# EAGLE board FIPI_shematics (EAGLE 8.2.1)
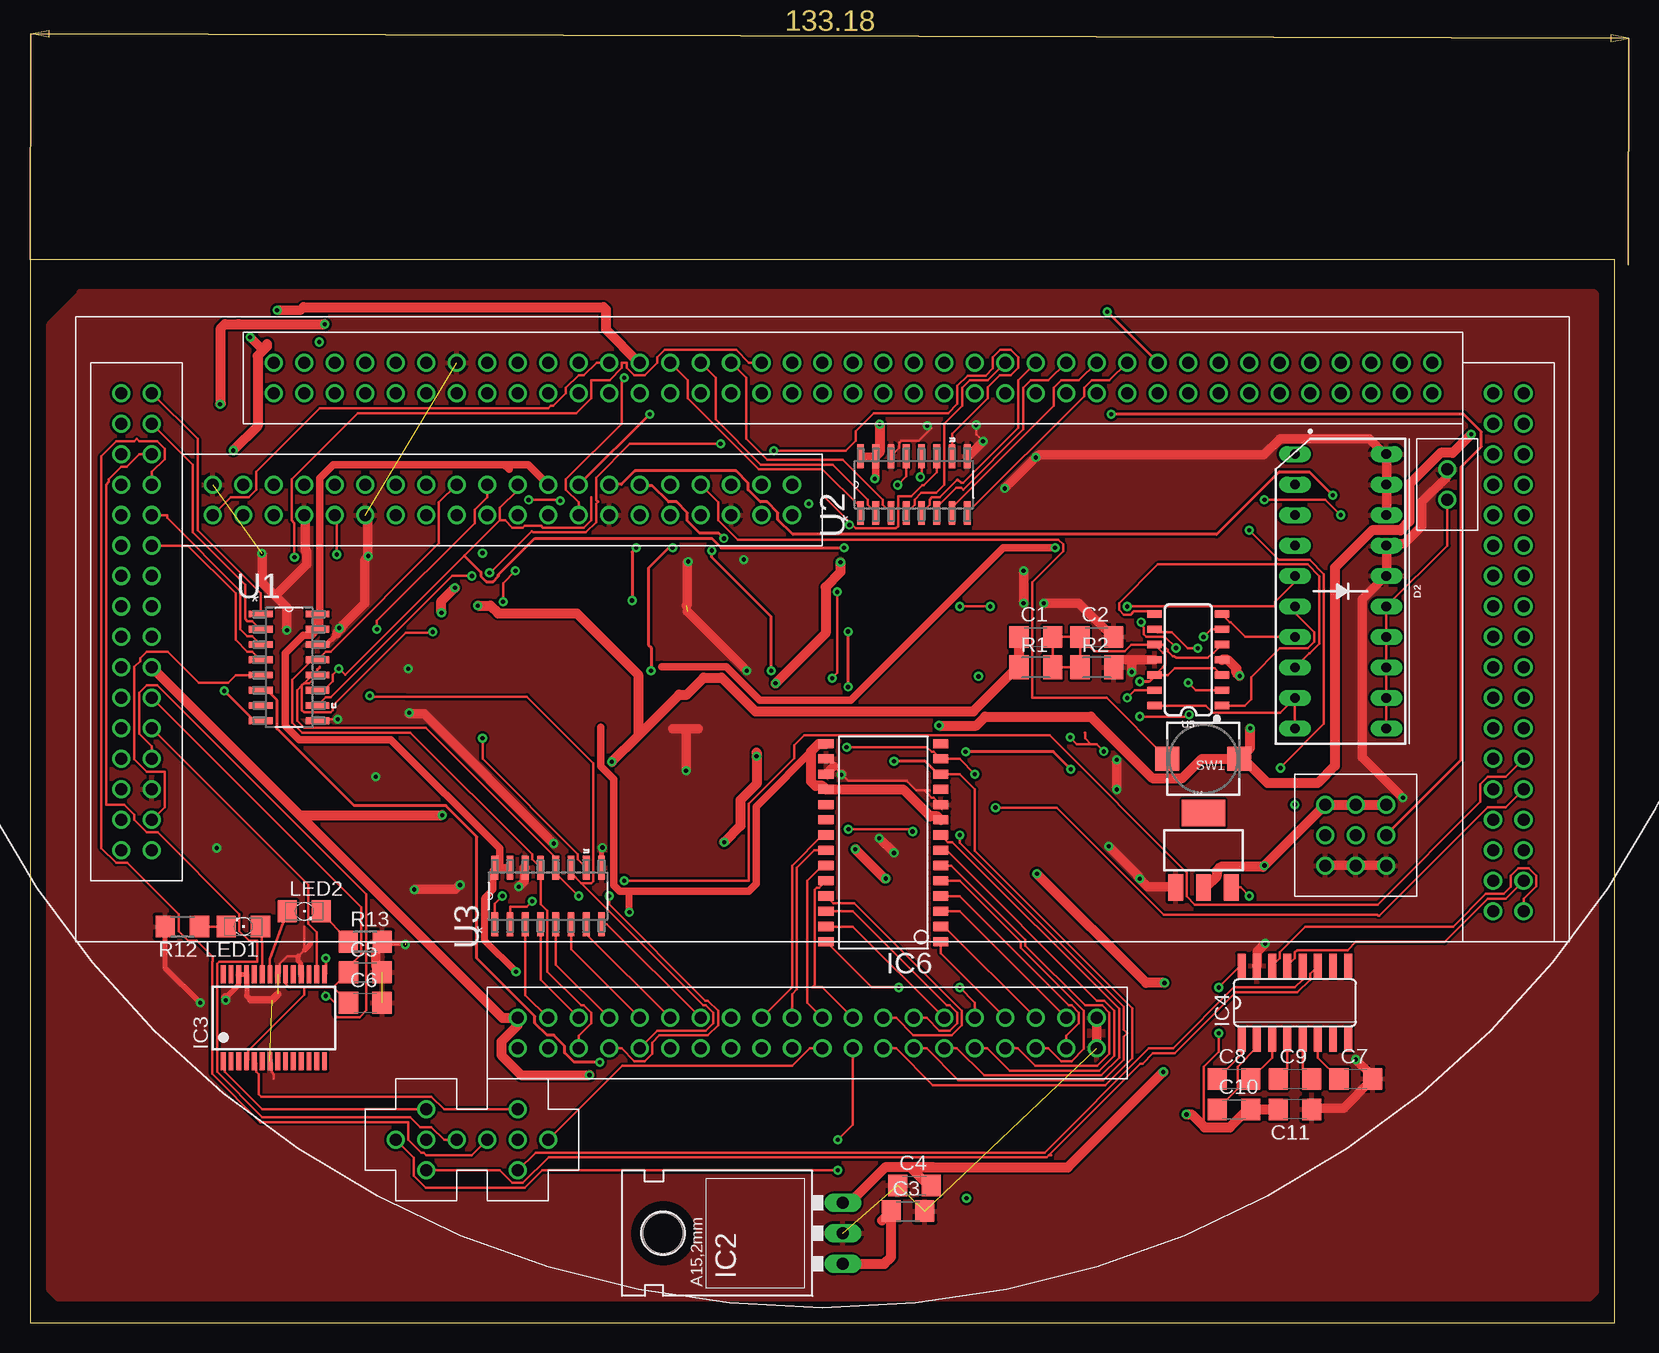
[diagram p0: board, top side]
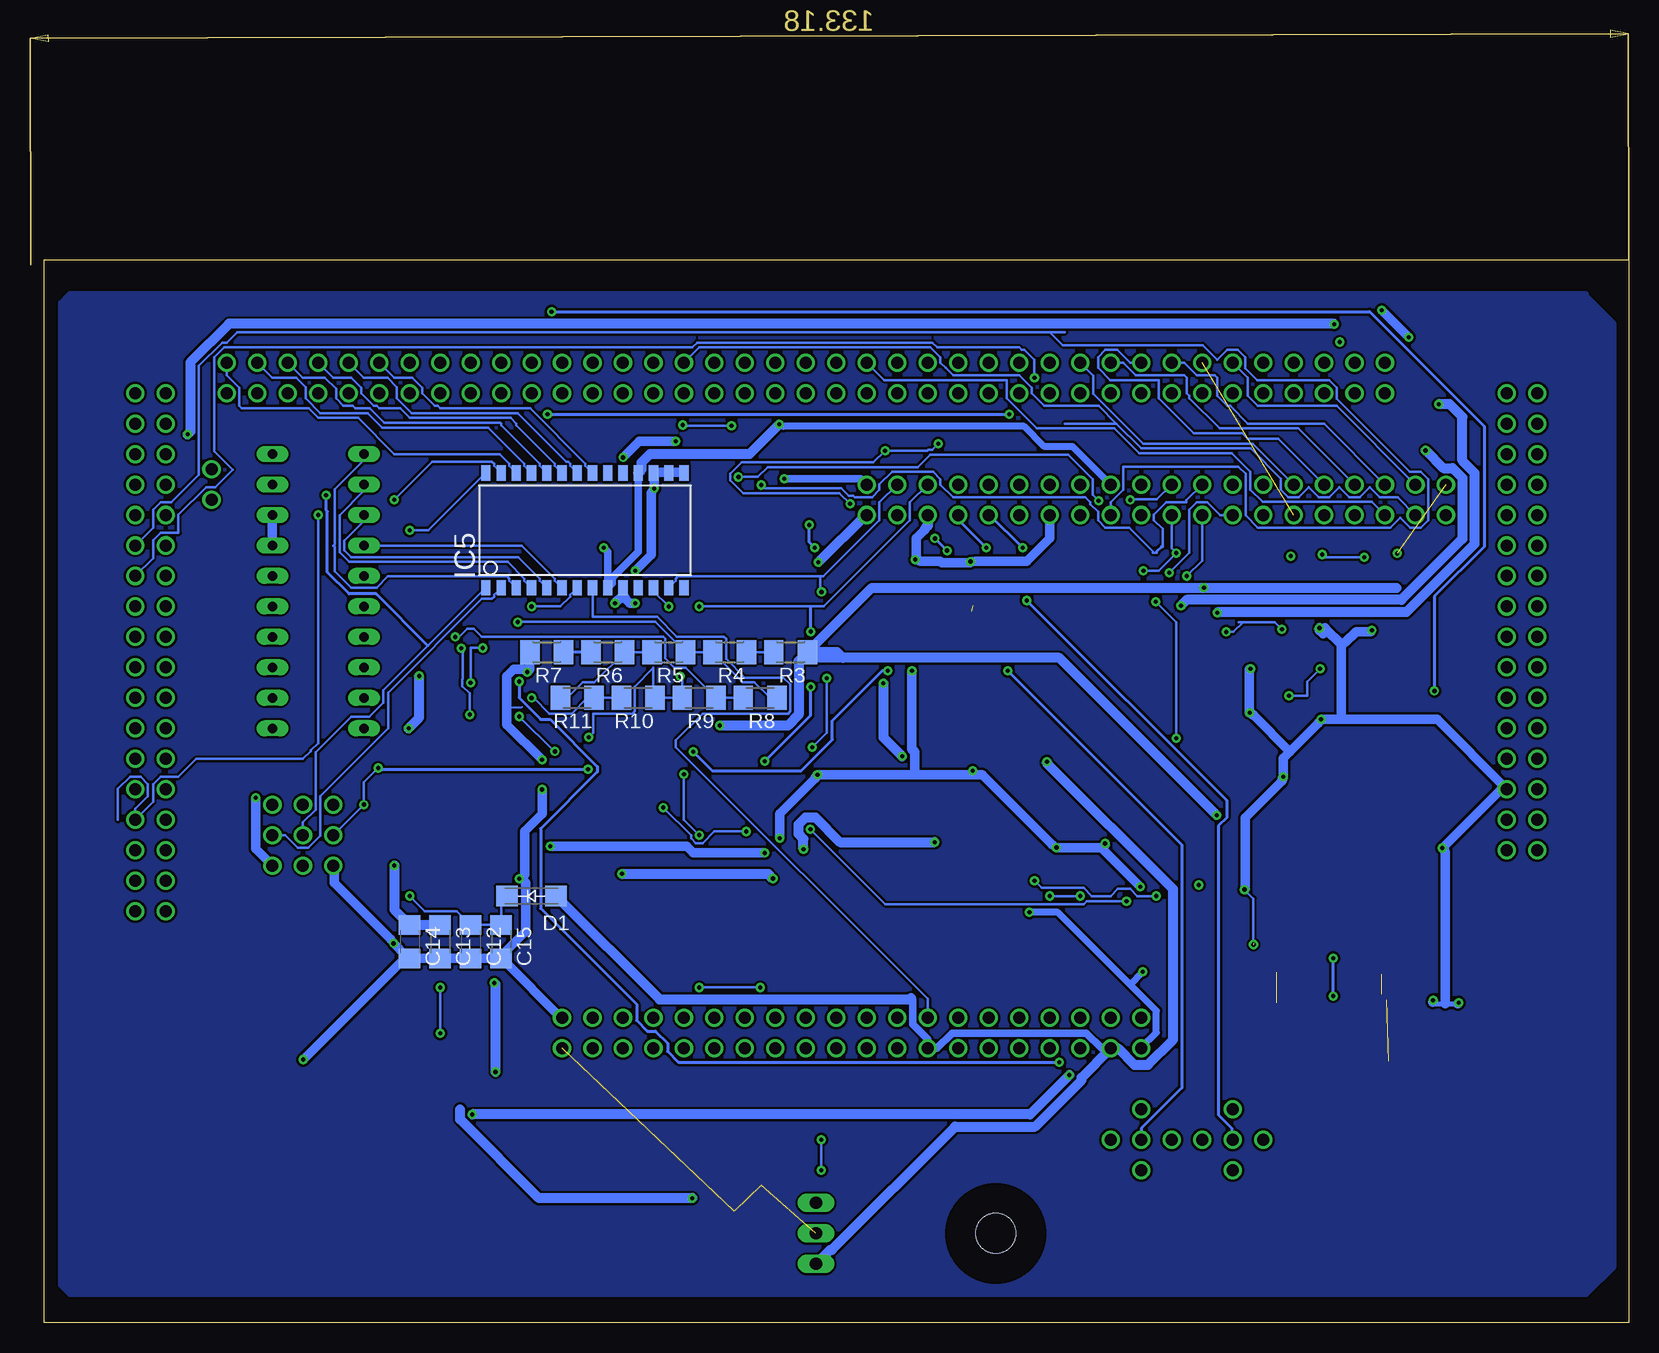
[diagram p1: board, bottom side, seen from below]

Size 132.06 x 88.57 mm. Coordinates in mm from the lower left corner, seen from the top.
Outline: 0,0 132.06,0 132.06,88.57 0,88.57 0,0
Copper layers (1*16): Top 0.035mm / dielectric 1.5mm / Bottom 0.035mm
Design rules "default": minimum track width 6mil, minimum drill 0.35mm, track to track 6mil, track to pad 6mil, pad to pad 6mil, via to via 6mil, smd to smd 6mil, copper to edge 40mil, drill to drill 6mil, minimum pad ring 10mil, minimum via ring 8mil, stop-mask expansion 4mil, vias tented up to drill 0mil, thermal gap 10mil
Net classes: 0 default: width 0.25 mm, clearance 0.2 mm; 1 power: width 0.8 mm, clearance 0.2 mm; 2 3.3v: width 0.6 mm, clearance 0.2 mm

## Footprints (pad centres in the part's own frame; a part is rotated, then mirrored left to right if it is on the bottom)
C1206 = smd 1.6 x 1.8: 1 -1.4,0; 2 1.4,0
SMA = smd 1.8 x 1.7: A -2.05,0; K 2.05,0
LED_BARGRAPH_10 = drill 0.813 long: 1 -11.43,-3.81; 2 -8.89,-3.81; 3 -6.35,-3.81; 4 -3.81,-3.81; 5 -1.27,-3.81; 6 1.27,-3.81; 7 3.81,-3.81; 8 6.35,-3.81; 9 8.89,-3.81; 10 11.43,-3.81; 11 11.43,3.81; 12 8.89,3.81; 13 6.35,3.81; 14 3.81,3.81; 15 1.27,3.81; 16 -1.27,3.81; 17 -3.81,3.81; 18 -6.35,3.81; 19 -8.89,3.81; 20 -11.43,3.81
78XXL = drill 1.016 long: GND 0,-3.81; IN -2.54,-3.81; OUT 2.54,-3.81 | hole 3.302: 0,11.176
SSOP28 = smd 0.4 x 1.5: 1 -4.225,-3.625; 2 -3.575,-3.625; 3 -2.925,-3.625; 4 -2.275,-3.625; 5 -1.625,-3.625; 6 -0.975,-3.625; 7 -0.325,-3.625; 8 0.325,-3.625; 9 0.975,-3.625; 10 1.625,-3.625; 11 2.275,-3.625; 12 2.925,-3.625; 13 3.575,-3.625; 14 4.225,-3.625; 15 4.225,3.625; 16 3.575,3.625; 17 2.925,3.625; 18 2.275,3.625; 19 1.625,3.625; 20 0.975,3.625; 21 0.325,3.625; 22 -0.325,3.625; 23 -0.975,3.625; 24 -1.625,3.625; 25 -2.275,3.625; 26 -2.925,3.625; 27 -3.575,3.625; 28 -4.225,3.625
SO16 = smd 0.66 x 2.032: 1 -4.445,-3.073; 2 -3.175,-3.073; 3 -1.905,-3.073; 4 -0.635,-3.073; 5 0.635,-3.073; 6 1.905,-3.073; 7 3.175,-3.073; 8 4.445,-3.073; 9 4.445,3.073; 10 3.175,3.073; 11 1.905,3.073; 12 0.635,3.073; 13 -0.635,3.073; 14 -1.905,3.073; 15 -3.175,3.073; 16 -4.445,3.073
SO28W = smd 0.762 x 1.27: 1 -7.62,-4.78; 2 -6.35,-4.78; 3 -5.08,-4.78; 4 -3.81,-4.78; 5 -2.54,-4.78; 6 -1.27,-4.78; 7 0,-4.78; 8 1.27,-4.78; 9 2.54,-4.78; 10 3.81,-4.78; 11 5.08,-4.78; 12 6.35,-4.78; 13 7.62,-4.78; 14 8.89,-4.78; 15 8.89,4.78; 16 7.62,4.78; 17 6.35,4.78; 18 5.08,4.78; 19 3.81,4.78; 20 2.54,4.78; 21 1.27,4.78; 22 0,4.78; 23 -1.27,4.78; 24 -2.54,4.78; 25 -3.81,4.78; 26 -5.08,4.78; 27 -6.35,4.78; 28 -7.62,4.78
LED_1206 = smd 1.6 x 1.803: A -1.422,0; C 1.422,0
M1206 = smd 1.6 x 2: 1 -1.4,0; 2 1.4,0
R1206 = smd 1.6 x 1.803: 1 -1.422,0; 2 1.422,0
MALE_HEADER_PACKAGE = drill 1: 1 -35.56,12.7; 2 -35.56,15.24; 3 -33.02,12.7; 4 -33.02,15.24; 5 -30.48,12.7; 6 -30.48,15.24; 7 -27.94,12.7; 8 -27.94,15.24; 9 -25.4,12.7; 10 -25.4,15.24; 11 -22.86,12.7; 12 -22.86,15.24; 13 -20.32,12.7; 14 -20.32,15.24; 15 -17.78,12.7; 16 -17.78,15.24; 17 -15.24,12.7; 18 -15.24,15.24; 19 -12.7,12.7; 20 -12.7,15.24; 21 -10.16,12.7; 22 -10.16,15.24; 23 -7.62,12.7; 24 -7.62,15.24; 25 -5.08,12.7; 26 -5.08,15.24; 27 -2.54,12.7; 28 -2.54,15.24; 29 0,12.7; 30 0,15.24; 31 2.54,12.7; 32 2.54,15.24; 33 5.08,12.7; 34 5.08,15.24; 35 7.62,12.7; 36 7.62,15.24; 37 10.16,12.7; 38 10.16,15.24; 39 12.7,12.7; 40 12.7,15.24
PUSHBUTTON_SMD_SJ = smd 2 x 2: P$1 3,0; P$2 -3,0
SOIC127P600X175-16N = smd 1.981 x 0.559: 1 -2.362,4.445; 2 -2.362,3.175; 3 -2.362,1.905; 4 -2.362,0.635; 5 -2.362,-0.635; 6 -2.362,-1.905; 7 -2.362,-3.175; 8 -2.362,-4.445; 9 2.362,-4.445; 10 2.362,-3.175; 11 2.362,-1.905; 12 2.362,-0.635; 13 2.362,0.635; 14 2.362,1.905; 15 2.362,3.175; 16 2.362,4.445
SOT223 = smd 1.219 x 2.235: 1 -2.311,-3.099; 2 0,-3.099; 3 2.311,-3.099 | smd 3.6 x 2.2: 4 0,3.099
SO14 = smd 0.6 x 1.2: 1 -3.175,-2.8; 2 -1.905,-2.8; 3 -0.635,-2.8; 4 0.635,-2.8; 5 1.905,-2.8; 6 3.175,-2.8; 7 4.445,-2.8; 8 4.445,2.8; 9 3.175,2.8; 10 1.905,2.8; 11 0.635,2.8; 12 -0.635,2.8; 13 -1.905,2.8; 14 -3.175,2.8
FEMHEADER = drill 1: 1 -83.82,-7.62; 2 -83.82,-5.08; 3 -83.82,-2.54; 4 -83.82,0; 5 -83.82,2.54; 6 -83.82,5.08; 7 -83.82,7.62; 8 -83.82,10.16; 9 -83.82,12.7; 10 -83.82,15.24; 11 -83.82,17.78; 12 -83.82,20.32; 13 -83.82,22.86; 14 -83.82,25.4; 15 -83.82,27.94; 16 -83.82,30.48; 17 -71.12,33.02; 18 -68.58,33.02; 19 -66.04,33.02; 20 -63.5,33.02; 21 -60.96,33.02; 22 -58.42,33.02; 23 -55.88,33.02; 24 -53.34,33.02; 25 -50.8,33.02; 26 -48.26,33.02; 27 -45.72,33.02; 28 -43.18,33.02; 29 -40.64,33.02; 30 -38.1,33.02; 31 -35.56,33.02; 32 -33.02,33.02; 33 -30.48,33.02; 34 -27.94,33.02; 35 -25.4,33.02; 36 -22.86,33.02; 37 -20.32,33.02; 38 -17.78,33.02; 39 -15.24,33.02; 40 -12.7,33.02; 41 -10.16,33.02; 42 -7.62,33.02; 43 -5.08,33.02; 44 -2.54,33.02; 45 0,33.02; 46 2.54,33.02; 47 5.08,33.02; 48 7.62,33.02; 49 10.16,33.02; 50 12.7,33.02; 51 15.24,33.02; 52 17.78,33.02; 53 20.32,33.02; 54 22.86,33.02; 55 25.4,33.02; 57 33.02,30.48; 58 33.02,27.94; 59 33.02,25.4; 60 33.02,22.86; 61 33.02,20.32; 62 33.02,17.78; 63 33.02,15.24; 64 33.02,12.7; 65 33.02,10.16; 66 33.02,7.62; 67 33.02,5.08; 68 33.02,2.54; 69 33.02,0; 70 33.02,-2.54; 71 33.02,-5.08; 72 33.02,-7.62; 73 33.02,-10.16; 74 33.02,-12.7; P1 -81.28,-7.62; P2 -81.28,-5.08; P3 -81.28,-2.54; P4 -81.28,0; P5 -81.28,2.54; P6 -81.28,5.08; P7 -81.28,7.62; P8 -81.28,10.16; P9 -81.28,12.7; P10 -81.28,15.24; P11 -81.28,17.78; P12 -81.28,20.32; P13 -81.28,22.86; P14 -81.28,25.4; P15 -81.28,27.94; P16 -81.28,30.48; P17 -71.12,30.48; P18 -68.58,30.48; P19 -66.04,30.48; P20 -63.5,30.48; P21 -60.96,30.48; P22 -58.42,30.48; P23 -55.88,30.48; P24 -53.34,30.48; P25 -50.8,30.48; P26 -48.26,30.48; P27 -45.72,30.48; P28 -43.18,30.48; P29 -40.64,30.48; P30 -38.1,30.48; P31 -35.56,30.48; P32 -33.02,30.48; P33 -30.48,30.48; P34 -27.94,30.48; P35 -25.4,30.48; P36 -22.86,30.48; P37 -20.32,30.48; P38 -17.78,30.48; P39 -15.24,30.48; P40 -12.7,30.48; P41 -10.16,30.48; P42 -7.62,30.48; P43 -5.08,30.48; P44 -2.54,30.48; P45 0,30.48; P46 2.54,30.48; P47 5.08,30.48; P48 7.62,30.48; P49 10.16,30.48; P50 12.7,30.48; P51 15.24,30.48; P52 17.78,30.48; P53 20.32,30.48; P54 22.86,30.48; P55 25.4,30.48; P57 30.48,30.48; P58 30.48,27.94; P59 30.48,25.4; P60 30.48,22.86; P61 30.48,20.32; P62 30.48,17.78; P63 30.48,15.24; P64 30.48,12.7; P65 30.48,10.16; P66 30.48,7.62; P67 30.48,5.08; P68 30.48,2.54; P69 30.48,0; P70 30.48,-2.54; P71 30.48,-5.08; P72 30.48,-7.62; P73 30.48,-10.16; P74 30.48,-12.7
SWITCH_RXTX = drill 1: RX -12.7,7.62; RXFT -12.7,10.16; RXP -10.16,7.62; RXRS -12.7,5.08; RXXB -15.24,7.62; TX -20.32,7.62; TXFT -20.32,10.16; TXP -22.86,7.62; TXRS -20.32,5.08; TXXB -17.78,7.62
SWITCH1 = drill 1: 1 -12.7,5.08; 2 -10.16,5.08
PORT_EXP = drill 1: 1 -25.4,5.08; 2 -22.86,5.08; 3 -20.32,5.08; 4 -17.78,5.08; 5 -15.24,5.08; 6 -12.7,5.08; 7 -10.16,5.08; 8 -7.62,5.08; 9 -5.08,5.08; 10 -2.54,5.08; 11 0,5.08; 12 2.54,5.08; 13 5.08,5.08; 14 7.62,5.08; 15 10.16,5.08; 16 12.7,5.08; 17 15.24,5.08; 18 17.78,5.08; 19 20.32,5.08; 20 22.86,5.08; 21 22.86,2.54; 22 20.32,2.54; 23 17.78,2.54; 24 15.24,2.54; 25 12.7,2.54; 26 10.16,2.54; 27 7.62,2.54; 28 5.08,2.54; 29 2.54,2.54; 30 0,2.54; 31 -2.54,2.54; 32 -5.08,2.54; 33 -7.62,2.54; 34 -10.16,2.54; 35 -12.7,2.54; 36 -15.24,2.54; 37 -17.78,2.54; 38 -20.32,2.54; 39 -22.86,2.54; 40 -25.4,2.54
SERVO = drill 1: 1 -20.32,5.08; 1" -15.24,5.08; 1' -17.78,5.08; 2 -20.32,2.54; 2" -15.24,2.54; 2' -17.78,2.54; 3 -20.32,0; 3" -15.24,0; 3' -17.78,0

## Placement (x,y rotation side)
C1  0.1u  [C1206]  83.82,57.15 0 top
C2  0.1u  [C1206]  88.9,57.15 0 top
C3  10u  [C1206]  73.16,9.3 0 top
C4  1u  [C1206]  73.71,11.44 0 top
C5  100u  [C1206]  27.94,29.21 0 top
C6  0.1u  [C1206]  27.94,26.67 0 top
C7  0.1u  [C1206]  110.49,20.32 0 top
C8  0.1u  [C1206]  100.33,20.32 0 top
C9  0.1u  [C1206]  105.41,20.32 0 top
C10  0.1u  [C1206]  100.33,17.78 0 top
C11  0.1u  [C1206]  105.41,17.78 180 top
C12  10u  [C1206]  96.52,31.75 270 bottom
C13  10u  [C1206]  99.06,31.75 270 bottom
C14  10u  [C1206]  101.6,31.75 270 bottom
C15  10u  [C1206]  93.98,31.75 270 bottom
D1  1N4007  [SMA]  91.44,35.56 180 bottom
D2  RED  [LED_BARGRAPH_10]  109.22,60.96 270 top
IC2  [78XXL]  63.93,7.45 90 top
IC3  FT232RL  [SSOP28]  20.32,25.4 0 top
IC4  MAX202CSE  [SO16]  105.41,26.67 0 top
IC5  MCP23017SO  [SO28W]  87.63,66.04 0 bottom
IC6  MCP23017SO  [SO28W]  71.12,39.37 90 top
LED1  [LED_1206]  17.78,33.02 180 top
LED2  [LED_1206]  22.86,34.29 0 top
R1  10k  [M1206]  83.82,54.61 0 top
R2  3.3k  [M1206]  88.9,54.61 0 top
R3  10k  [M1206]  69.85,55.88 180 bottom
R4  10k  [M1206]  74.93,55.88 180 bottom
R5  10k  [M1206]  80.01,55.88 180 bottom
R6  10k  [M1206]  85.09,55.88 180 bottom
R7  10k  [M1206]  90.17,55.88 180 bottom
R8  10k  [M1206]  72.39,52.07 180 bottom
R9  10k  [M1206]  77.47,52.07 180 bottom
R10  10k  [M1206]  82.55,52.07 180 bottom
R11  10k  [M1206]  87.63,52.07 180 bottom
R12  270E  [R1206]  12.7,33.02 180 top
R13  270E  [R1206]  27.94,31.75 0 top
RASPPI  MALE_HEADER  [MALE_HEADER_PACKAGE]  27.94,82.55 180 top
SW1  [PUSHBUTTON_SMD_SJ]  97.79,46.99 180 top
U1  MCP3008-I/SL  [SOIC127P600X175-16N]  21.59,54.61 0 top
U2  MCP3008-I/SL  [SOIC127P600X175-16N]  73.66,69.85 90 top
U3  MCP3008-I/SL  [SOIC127P600X175-16N]  43.18,35.56 90 top
U4  [SOT223]  97.79,39.37 0 top
U5  LMV324  [SO14]  96.52,54.61 90 top
U$1  BOARD  [FEMHEADER]  91.44,46.99 0 top
U$3  SWITCH_RXTX  [SWITCH_RXTX]  53.34,7.62 0 top
U$4  SWITCH1  [SWITCH1]  113.03,58.42 270 top
U$5  PORT_EXP  [PORT_EXP]  66.04,20.32 0 top
U$7  SERVO  [SERVO]  128.27,38.1 0 top

## Library data of the parts
C1-C15 = rcl
D1 = casovac
D2 = SparkFun-LED; PROD_ID: DIO-10615
IC2 = tango
IC3 = ftdichip; MPN: FT232RL; OC_FARNELL: 1146032; OC_NEWARK: 91K9918
IC4 = maxim-8
IC5 IC6 SW1 = adafruit
LED1 LED2 = eagle-ltspice; SPICEMODEL: NONE; SPICEPREFIX: D; SPICETYPE: diode
R1-R13 = resistor
RASPPI = male_header_device
U1-U3 = MCP3008-I_SL; AVAILABILITY: Good; DESCRIPTION: Eight Channel SPI Serial Interface 2.7 V 10-Bit A/D Converter SMT - SOIC-16; MF: Microchip; MP: MCP3008-I/SL; PACKAGE: SOIC-16 Microchip; PRICE: 2.02 USD
U4 = SparkFun-IC-Power; PROD_ID: VREG-08170
U5 = SparkFun-IC-Amplifiers; PROD_ID: IC-08227
U$1 U$5 = fem_header
U$3 U$4 U$7 = switch

## Nets
3.3V [3.3v]: IC5.9 IC5.18 IC6.9 IC6.15 IC6.18 RASPPI.1 RASPPI.17 U1.15 U1.16 U2.15 U2.16 U3.15 U3.16 U$5.40
5V [power]: C10.2 C11.2 IC4.16 R3.1 SW1.P$2 U5.4 U$1.P7 U$5.1
5V_SERVO: C13.1 C14.1 U4.2 U$7.1 U$7.1" U$7.1'
9-12V [power]: C1.1 C3.1 D1.A IC2.IN R1.1 U$1.29 U$5.33 U$5.39
BARGRAPH1: D2.1 IC5.3
BARGRAPH2: D2.2 IC5.4
BARGRAPH3: D2.3 IC5.5
BARGRAPH4: D2.4 IC5.6
BARGRAPH5: D2.5 IC5.7
BUZZER: IC5.27 U$1.71
CE0: RASPPI.24 U1.10
CE1: RASPPI.26 U2.10
CE2: RASPPI.22 U3.10
DB4: RASPPI.33 U$1.26
DB5: RASPPI.31 U$1.25
DB6: RASPPI.29 U$1.27
DB7: RASPPI.40 U$1.28
EN: RASPPI.35 U$1.24
GND [power]: C2.2 C3.2 C4.1 C5.2 C6.2 C7.2 C11.1 C12.2 C13.2 C14.2 C15.2 D2.16 D2.17 D2.18 D2.19 D2.20 IC2.GND IC3.7 IC3.18 IC3.21 IC3.25 IC3.26 IC4.15 IC5.10 IC5.15 IC5.16 IC5.17 IC6.10 IC6.16 IC6.17 R2.2 R7.2 R12.2 R13.2 RASPPI.6 RASPPI.14 RASPPI.30 RASPPI.34 RASPPI.39 U1.9 U1.14 U2.9 U2.14 U3.9 U3.14 U4.1 U5.11 U$1.23 U$1.P3 U$4.1 U$5.20 U$5.21 U$7.3 U$7.3" U$7.3'
INTERRUPT: RASPPI.7 SW1.P$1
IRP1: U1.3 U$1.P12
IRP2: U1.1 U$1.P16
IRP3: U2.5 U$1.42
IRP4: U2.6 U$1.43
IRP5: U1.8 U$1.46
IRP6: U3.1 U$1.69
IRP7: U3.2 U$1.70
IRP8: U1.5 U$1.P2
IRPD: RASPPI.36 U$1.34
L1: IC5.22 U$1.51
L2: IC5.23 U$1.52
MB73: IC4.13 U$1.73
MB74: IC4.14 U$1.74
MISO: RASPPI.21 U1.12 U2.12 U3.12 U$5.37
MOSI: RASPPI.19 U1.11 U2.11 U3.11 U$5.36
N$1: R3.2 R4.1
N$2: C12.1 C15.1 D1.K U4.3
N$3: R4.2 R5.1 R8.1 U5.2
N$4: R5.2 R6.1 R11.2
N$5: R6.2 R7.1
N$6: R8.2 R9.1 U5.6
N$7: R9.2 R10.1 U5.9
N$8: R10.2 R11.1 U5.13
N$9: D2.11 D2.12 D2.13 D2.14 D2.15 U$4.2
N$14: D2.9 D2.10 U5.14
N$15: D2.8 U5.8
N$16: D2.7 U5.7
N$17: D2.6 U5.1
N$19: C8.1 IC4.1
N$20: C8.2 IC4.3
N$21: C9.1 IC4.4
N$22: C9.2 IC4.5
N$23: IC3.23 LED1.A
N$24: IC3.22 LED2.A
N$25: LED1.C R12.1
N$26: LED2.C R13.1
PEL: RASPPI.18 U$1.62
PER: RASPPI.16 U$1.63
PWML: IC5.21 U$1.50
PWMR: IC5.25 U$1.54
R1: IC5.24 U$1.53
R2: IC5.26 U$1.55
RASP_5V [power]: C4.2 IC2.OUT RASPPI.2
RS: RASPPI.37 U$1.22
RX: RASPPI.8 U$3.RX
RXFT: IC3.5 U$3.RXFT
RXP: U$3.RXP U$5.30
RXRS: IC4.12 U$3.RXRS
RXXB: U$1.P13 U$3.RXXB
SCL: IC5.12 IC6.12 RASPPI.5 U$5.28
SCLK: RASPPI.23 U1.13 U2.13 U3.13 U$5.38
SDA: IC5.13 IC6.13 RASPPI.3 U$5.27
SERVO1: IC5.28 RASPPI.11 U$7.2
SERVO2: IC5.1 RASPPI.13 U$7.2'
SERVO3: IC5.2 RASPPI.15 U$7.2"
SIR1: U1.4 U$1.P11
SIR2: U1.2 U$1.P15
SIR3: U2.4 U$1.41
SIR4: U2.7 U$1.44
SIR5: U2.8 U$1.45
SIRD: RASPPI.32 U$1.33
TSOP: U1.7
TX: RASPPI.10 U$3.TX
TXFT: IC3.1 U$3.TXFT
TXP: U$3.TXP U$5.29
TXRS: IC4.11 U$3.TXRS
TXXB: U$1.P14 U$3.TXXB
USB+: IC3.15 U$1.P4
USB-: IC3.16 U$1.P5
V+: C10.1 IC4.2
V-: C7.1 IC4.6
VOLT_SENS: C1.2 C2.1 R1.2 R2.1 U1.6 U5.3 U5.5 U5.10 U5.12
VUSB [power]: C5.1 C6.1 IC3.4 IC3.20 U$1.P6
WLS1: U2.1 U$1.30
WLS2: U2.2 U$1.31
WLS3: U2.3 U$1.32
WLS4: U$5.35
WLS5: U$5.34
WLS6: U$5.31
WLS7: U$5.32
WLSD: RASPPI.38 U$1.40
XADC1: U3.3 U$5.2
XADC2: U3.4 U$5.3
XADC3: U3.5 U$5.4
XADC4: U3.6 U$5.5
XADC5: U3.7 U$5.6
XADC6: U3.8 U$5.7
XGPIO1: IC5.8 U$5.8
XGPIO2: IC6.21 U$5.9
XGPIO3: IC6.22 U$5.10
XGPIO4: IC6.23 U$5.11
XGPIO5: IC6.24 U$5.12
XGPIO6: IC6.25 U$5.13
XGPIO7: IC6.26 U$5.14
XGPIO8: IC6.27 U$5.15
XGPIO9: IC6.28 U$5.16
XGPIO10: IC6.1 U$5.17
XGPIO11: IC6.2 U$5.18
XGPIO12: IC6.3 U$5.19
XGPIO13: IC6.4 U$5.22
XGPIO14: IC6.5 U$5.23
XGPIO15: IC6.6 U$5.24
XGPIO16: IC6.7 U$5.25
XGPIO17: IC6.8 U$5.26

## Tracks (layer width: path | path; a pad name or v marks a point on that pad's centre or on a via)
3.3V  (via drill 0.35)
  Top 0.6: IC6.15 66.38,48.26 66.34,48.23 | v49.95,34.2 49.95,35.95 | v40.5,29.25 37.91,31.84 37.91,35.44 38.59,36.11 38.59,37.69 U3.16
  Top 0.61: U1.16 U1.15 | U1.15 23.47,57.3 22.75,57.3 21.26,55.8 21.26,49.74 22.42,48.58 30.08,48.58 39.13,39.53 39.13,37.92 | U3.16 39.13,37.92 | 39.13,37.92 U3.15 | U1.15 24.14,57.97 24.14,70.37 25.28,71.51 36.32,71.51 | 36.32,71.51 39.53,71.51 | 39.53,71.51 39.93,71.11 | v70.39,70.34 70.48,70.44 U2.15 U2.16 | 66.34,48.23 65.73,48.23 60.51,43.02 60.51,36.58 59.88,35.95 49.95,35.95 49.16,35.95 48.65,36.46 48.65,45.29 47.58,46.36 47.58,49.61 | 52.63,54.67 58.02,54.67 60.83,51.86 68.39,51.86 81.11,64.58 v85.42,64.58 | 39.53,71.51 41.52,71.51 | 41.52,71.51 RASPPI.17 | 41.52,71.51 36.32,71.51
  Top 0.813: IC6.9 75.62,42.19 75.01,42.19 72.76,44.45 IC6.18 66.06,44.73 65.45,44.73 65.1,45.09 65.1,47.62 65.71,48.23 66.34,48.23 | U2.15 70.81,72.54 v70.81,74.87
  Bottom 0.6: v70.81,74.87 70.42,74.7 50.4,74.7 48.71,73.01 46.35,73.01 43.2,69.86 RASPPI.17 | v49.95,34.2 47.59,34.2 41.57,28.18 | 41.57,28.18 39.38,25.99 39.38,24.19 40.61,22.95 U$5.40 | 41.57,28.18 v40.5,29.25
  Bottom 0.61: RASPPI.1 63.99,70.34 v70.39,70.34 | IC5.18 82.55,64.26 84.71,62.1 84.71,61.64 IC5.9 85.09,64.25 v85.42,64.58
  Bottom 0.813: v70.81,74.87 73.27,72.41 81.56,72.41 82.27,71.71 82.27,71.1 IC5.18
5V  (via drill 0.35)
  Top 0.2: v99.06,24.13 99.06,22.57 97.83,21.34 97.83,16.76 98.01,16.58 99.85,16.58 101.05,17.78 C10.2 | v99.06,27.94 100.86,29.74 IC4.16
  Top 0.813: v46.62,20.64 40.94,20.64 39.28,22.3 39.28,23.42 40.64,24.78 U$5.1 39.37,25.4 U$1.P7 22.47,42.3 v34.35,42.3 | v96.37,17.36 96.79,17.36 97.88,16.27 99.98,16.27 101.49,17.78 C10.2 C11.2 | v120.1,74.03 118.55,72.48 117.55,72.48 114.96,69.89 114.96,66.78 114.21,66.04 111.84,66.04 108.74,62.93 108.74,46.4 107.31,44.97 103.14,44.97 101.12,46.99 SW1.P$2 | SW1.P$2 101.68,47.88 v101.68,49.54 | v100.8,53.9 100.53,54.17 100.53,54.53 99.81,55.24 U5.4 | SW1.P$2 97.65,46.99 96.04,45.38 93.54,45.38 88.41,50.52 79.6,50.52 78.86,49.77 v75.75,49.77 | v34.29,59.17 34.29,60.12 v35.41,61.24 | v15.84,76.55 15.9,76.61 15.9,82.88 16.24,83.22 17.39,83.22 v24.56,83.22
  Bottom 0.2: v99.06,24.13 v99.06,27.94
  Bottom 0.813: v46.62,20.64 49.9,17.36 v96.37,17.36 | v34.35,42.3 47.46,55.41 65.5,55.41 | 65.5,55.41 68.86,55.41 | 65.5,55.41 65.97,55.88 R3.1 | v120.1,74.03 119.87,74.26 119.87,76.72 119.87,80.03 116.65,83.26 24.6,83.26 v24.56,83.22 | R3.1 63.09,61.24 v35.41,61.24 19.38,61.24 | v101.68,49.54 100.8,50.42 100.8,52.02 100.8,52.43 v100.8,53.9 | R3.1 69.18,55.15 69.18,50.65 70.07,49.77 v75.75,49.77 | v34.29,59.17 34.24,59.22 18.54,59.22 12.87,64.89 12.87,70.83 13.88,71.85 13.88,75.49 14.94,76.55 v15.84,76.55
5V_SERVO  (via drill 0.35)
  Top 0.2: 97.95,36.27 U4.2
  Top 0.813: 97.95,36.27 98.89,37.21 98.89,37.64 99.24,37.99 102.77,37.99 v102.87,38.1 U$7.1 U$7.1' U$7.1"
  Bottom 0.813: v102.87,38.1 102.87,34.42 C14.1 C13.1
9-12V  (via drill 0.35)
  Top 0.8: v20.59,84.38 22.5,84.38 22.81,84.63 | 19.42,81.04 v18.34,82.12
  Top 0.813: v48.49,46.74 50.67,48.92 | C1.1 R1.1 82.27,54.61 78.61,50.95 60.45,50.95 57.64,53.76 56.14,53.76 54.73,52.35 54.1,52.35 50.67,48.92 | U$1.29 50.75,80.01 47.98,82.78 47.98,84.44 47.79,84.63 22.81,84.63 | v16.94,72.69 18.96,74.71 18.96,80.57 19.42,81.04 19.76,81.37 19.76,81.58 | v37.32,59.76 38.36,59.76 39.01,59.1 45.58,59.1 50.67,54.01 50.67,48.92 | 70.98,8.52 C3.1 71.76,5.47 71.19,4.9 IC2.IN
  Bottom 0.61: 59.78,26.94 59.68,26.84 59.68,24.88 58.42,23.62 U$5.33 57.66,22.86 56.4,24.12 45.2,24.12 43.94,22.86 U$5.39
  Bottom 0.8: v18.34,82.12 v20.59,84.38
  Bottom 0.813: D1.A 80.77,26.94 59.78,26.94 59.84,27 59.84,27.05 | v48.49,46.74 48.49,46.64 37.98,36.13 37.98,23.59 40.08,21.5 41.2,21.5 42.56,22.86 U$5.39 45.61,20.43 45.61,20.22 49.48,16.35 56.15,16.35 66.41,6.08 66.57,6.08 IC2.IN | v37.32,59.76 36.85,60.23 18.96,60.23 13.88,65.31 13.88,70.41 14.68,71.21 15.46,71.21 v16.94,72.69
BARGRAPH1
  Bottom 0.2: IC5.3 93.3,61.85 93.3,62.02 93.47,62.2 103.43,62.2 104.35,61.27 106.47,61.27 107.83,62.63 107.83,64.65 107.95,64.77 107.83,64.89 107.83,69.45 105.41,71.87 D2.1
BARGRAPH2
  Bottom 0.2: IC5.4 92.03,61.85 92.03,62.02 93.42,63.41 106.63,63.41 107.43,64.21 107.43,67.31 105.41,69.33 D2.2
BARGRAPH3
  Bottom 0.2: IC5.5 90.76,61.85 90.76,62.02 92.55,63.81 106.47,63.81 107.03,64.37 107.03,65.17 105.41,66.79 D2.3
BARGRAPH4
  Bottom 0.2: IC5.6 89.49,61.85 89.49,62.02 92.24,64.77 D2.4
BARGRAPH5  (via drill 0.35)
  Top 0.2: v91.44,59.69 103.79,59.69 103.79,60.09 105.41,61.71 D2.5
  Bottom 0.2: IC5.7 88.22,60.67 88.22,60.5 89.03,59.69 v91.44,59.69
BUZZER  (via drill 0.35)
  Top 0.2: v109.22,67.31 107.95,68.58 v102.87,68.58
  Bottom 0.2: v109.22,67.31 109.22,48.3 109.84,47.69 109.84,47.64 110.49,46.99 119.38,46.99 120.87,45.5 122.36,45.5 122.97,44.89 122.97,43.4 U$1.71 124.46,42.84 123.41,43.89 123.41,44.89 124.02,45.5 124.9,45.5 125.91,44.49 125.91,41.91 | IC5.27 94.57,71.41 94.57,71.58 94.75,71.75 99.69,71.75 v102.87,68.58
CE0  (via drill 0.35)
  Top 0.2: U1.10 24.64,52.13 25.07,52.13 35.17,62.23 v36.83,62.23
  Bottom 0.2: v36.83,62.23 35.56,63.5 RASPPI.24
CE1  (via drill 0.35)
  Top 0.2: v61.98,72.67 67.98,72.67 68.81,73.5 68.81,74.3 70.31,75.8 76.5,75.8 77.29,76.58 77.29,78.07 78.14,78.92 79.63,78.92 80.23,79.52 80.23,80.45 80.84,81.06 81.72,81.06 82.33,80.45 82.33,79.57 81.72,78.96 80.79,78.96 79.79,77.96 79.79,77.03 76.83,74.07 U2.10 | v64.9,68.24 64.74,68.4 | v38.29,62.5 38.36,62.5 41.82,65.96 41.92,65.86 46.32,65.86 47.17,66.71 47.17,68.23 47.34,68.4 47.17,68.56 47.17,68.96 47.17,68.97 47.17,70.42 49.99,73.24 v57.55,73.24
  Bottom 0.2: v64.9,68.24 65.79,69.13 73.81,69.13 74.88,70.2 74.88,70.76 73.94,71.7 62.95,71.7 v61.98,72.67 58.46,72.67 58.39,72.74 58.05,72.74 v57.55,73.24 | v38.29,62.5 36.61,64.18 36.61,67.75 36,68.36 35.12,68.36 34.07,67.31 RASPPI.26
CE2  (via drill 0.35)
  Top 0.2: U3.10 45.66,38.61 45.66,39.04 37.71,46.99 v37.71,48.72 | v39.42,60.09 39.42,61.64 v40.45,62.67
  Bottom 0.2: RASPPI.22 38.1,64.53 v37.71,64.14 39.18,62.67 v40.45,62.67 | v37.71,48.72 37.71,58.38 v39.42,60.09
DB4
  Bottom 0.2: RASPPI.33 27.54,74.53 34.11,74.53 36.61,77.03 36.61,77.25 36.83,77.47 36.83,78.74 37.05,78.96 41.08,78.96 42.13,80.01 U$1.26
DB5
  Bottom 0.2: RASPPI.31 29.21,73.66 31.75,73.66 32.22,74.13 36.25,74.13 39.15,77.03 39.15,78.56 43.22,78.56 44.23,79.57 44.23,80.45 43.62,81.06 42.62,81.06 41.56,80.01 U$1.25
DB6
  Bottom 0.2: RASPPI.29 31.35,73.26 40.46,73.26 44.63,77.43 44.63,78.92 U$1.27
DB7
  Top 0.2: RASPPI.40 16.73,68.8 18.22,68.8 18.83,69.41 18.83,70.9 24.13,76.2 43.18,76.2 43.4,76.42 43.62,76.42 44.67,77.47 44.67,77.91 45.72,78.96 46.16,78.96 47.21,80.01 U$1.28
EN
  Bottom 0.2: RASPPI.35 25.4,74.93 31.75,74.93 33.24,76.42 33.46,76.42 34.29,77.25 34.29,78.74 34.51,78.96 36,78.96 37.05,80.01 U$1.24
GND  (via drill 0.35)  (10 unrouted)
  Top 0.2: IC3.7 20.14,21.62 20.14,20.9 20.32,20.73 20.32,20.32 | IC3.21 20.8,29.18 20.8,29.9 21.44,30.55 22.36,30.55 22.86,31.05 22.86,33.02 | IC6.16 66.96,46.37 67.63,45.7 68.17,45.16 73.05,45.16 73.83,44.37 74.54,44.37 | 74.54,44.37 74.97,44.37 | IC6.10 75.31,43.77 75.14,43.77 74.54,44.37 | 25.29,57.43 25.55,57.43 | U1.9 24.09,50.3 v25.65,50.3 | U2.14 72.45,72.9 72.45,73.33 72.62,73.5 74.08,73.5 75.11,74.53 75,74.53 v74.78,74.75 | v78.84,74.81 78.84,74.05 v79.42,73.46
  Top 0.406: 18.38,26.93 18.05,27.27 IC3.25 IC3.26 17.35,28.98 17.35,28.11 16.33,27.09 16.33,26.7 | 14.27,26.57 v14.18,26.66 11.28,29.56 R12.2 | 22.36,30.55 22.36,30.13 22.55,29.94 22.55,29.07 IC3.18 22.64,28.98 | R13.2 29.5,31.61 31.26,31.61 | 22.86,31.05 23.39,31.58 | 25.55,57.43 25.55,57.35 24.65,56.45 24.02,56.45 U1.14 | U3.9 47.62,39.52 v47.7,39.6
  Top 0.61: 20.64,27.39 20.18,26.93 18.38,26.93
  Top 0.8: v84.49,59.96 87.41,59.96 90.22,57.15 C2.2 | v40.73,36.34 41.17,36.79 41.17,37.91 U3.14 | v25.65,50.29 v25.65,50.3 | U$4.1 118.01,71.1 118.01,70.42 115.99,68.4 115.99,66.38 114.53,64.91 113.4,64.91 D2.17 113.06,64.69 113.06,62.33 D2.16 112.72,61.99 111.04,60.3 111.04,47.14 v114.41,43.76 | v79.42,73.46 78.19,72.22 U2.9 | v81.22,69.53 v83.81,72.11 84.15,72.34 102.83,72.34 104.17,73.69 111.6,73.69 112.72,72.56 D2.20 113.06,72.34 113.06,70.2 D2.19 113.06,69.75 113.06,67.39 D2.18 | v82.8,62.66 v82.8,59.96 | U$7.3 108,38.14 110.47,38.14 U$7.3' 110.81,38.14 112.95,38.14 U$7.3" | C11.1 106.88,17.89 109.46,17.89 111.83,20.25 C7.2 111.71,20.7 v110.47,21.94 | U$5.21 88.88,22.95 88.88,25.31 U$5.20 | 91.8,55.24 90.9,55.24 90.34,54.67 R2.2 | 91.8,55.24 U5.11 | 91.8,55.24 v91.8,54.23 | v102.94,31.61 102.26,30.94 102.26,29.81 IC4.15 | U4.1 95.4,36.34 93.15,36.34 v92.47,37.01 92.25,37.35 v89.89,39.71 | v90.56,44.44 v90.56,46.91 | 54.67,59.74 54.79,59.85 54.79,63.34 v54.86,63.43 | 55.69,49.5 54.67,49.5 | 54.67,49.5 53.55,49.5 | 66.96,46.37 66.38,45.79 IC6.17 | v67.61,45.67 67.63,45.7 | v54.67,46.01 54.67,49.5 | v59.74,54.34 54.79,59.29 | 28.12,63.9 28.12,67.16 28.01,67.28 RASPPI.30 | 28.12,63.9 v28.18,63.89 | 20.42,60.58 21.38,59.62 21.38,57.71 v21.41,57.71 | 20.42,60.58 19.35,61.65 19.35,64.01 v19.31,64.11 | 25.88,57.83 25.65,57.6 25.55,57.43 | 25.88,57.83 v25.78,57.89 | 20.42,60.58 23.06,63.23 23.06,64.24 22.95,64.35 22.95,67.28 RASPPI.34 | 28.12,63.9 27.9,63.56 27.9,59.96 26.1,58.16 25.88,57.83 | R13.2 28.8,30.94 28.8,29.7 29.25,29.25 C5.2 | v32.03,36.1 32.06,36.11 35.44,36.11 35.77,36.45 v35.84,36.48
  Top 0.8: v16.31,26.89 16.33,27.09 | v14.18,26.66 | v43.65,39.94 32.85,50.74 31.61,50.74 v31.6,50.83 | v70.76,40.39 v72,39.15
  Bottom 0.152: 93.49,51.3 92.25,51.3
  Bottom 0.2: v74.78,74.75 78.78,74.75 v78.84,74.81 | v31.28,31.52 31.28,35.35 v32.03,36.1
  Bottom 0.406: 16.33,26.7 16.2,26.57 15.3,26.57 14.27,26.57
  Bottom 0.8: 83.81,60.64 v84.49,59.96 | 83.81,60.64 83.81,61.2 IC5.10 | v40.73,36.34 43.93,39.54 | 43.93,39.54 43.99,39.6 v47.7,39.6 48.04,39.83 53.89,45.67 54.67,45.67 | 23.96,50.29 15.97,50.29 10.24,44.55 U$1.P3 10.69,44.44 15.53,39.6 | 23.96,50.29 v25.65,50.29 25.88,49.95 28.24,47.59 | 58.42,66.38 58.5,66.38 58.73,66.04 59.4,65.36 59.4,63.67 | IC5.15 78.75,70.88 79.99,70.88 IC5.16 80.33,70.88 81.22,70.88 IC5.17 81.22,70.42 v81.22,69.53 81.45,69.19 81.45,64.01 v82.8,62.66 | v79.42,73.46 82.46,73.46 v83.81,72.11 | v82.8,59.96 83.25,59.96 83.59,60.3 83.81,60.64 | D2.17 113.06,64.8 113.06,67.28 D2.18 | R7.2 91.58,55.8 91.58,54.45 v91.8,54.23 92.14,54.45 92.92,54.45 93.49,53.89 93.49,51.3 93.49,49.84 v90.56,46.91 | C15.2 94.05,30.38 96.41,30.38 C12.2 96.86,30.38 99,30.38 C13.2 99.45,30.38 101.59,30.38 C14.2 | C14.2 101.92,30.6 v102.94,31.61 103.16,31.95 107.89,36.67 107.89,38.02 U$7.3 | 92.25,37.01 v92.47,37.01 | 92.25,37.01 91.91,36.67 91.91,32.62 93.83,30.71 C15.2 | v90.56,44.44 90.56,42.41 92.03,40.95 92.03,37.35 92.25,37.01 | U$5.20 88.99,25.43 93.71,30.15 C15.2 | v110.47,21.94 102.15,30.26 C14.2 | v114.41,43.76 114.41,39.49 113.06,38.14 U$7.3" | 59.4,63.67 v59.47,63.6 | 59.4,63.67 59.06,63.45 57.38,63.45 57.26,63.34 54.9,63.34 v54.86,63.43 54.45,63.45 50.17,63.45 48.26,65.36 48.26,67.28 RASPPI.14 | 54.67,45.67 59.51,45.67 | 59.51,45.67 v67.61,45.67 67.84,45.34 70.76,42.41 v70.76,40.39 | v54.67,46.01 54.67,45.67 | v59.74,54.34 59.74,47.81 59.51,47.59 59.51,45.67 | v21.41,57.71 21.49,57.6 22.73,57.6 23.62,56.7 23.94,56.49 23.96,56.14 23.96,50.29 | v31.52,54.5 31.61,54.45 31.61,50.85 v31.6,50.83 31.27,50.62 28.24,47.59
  Bottom 0.8: 15.53,39.6 v15.56,39.56 | 28.24,47.59 28.8,47.02 28.8,45.56 v28.81,45.49 28.91,45.11 31.95,42.08 31.95,36.11 v32.03,36.1 | 15.3,26.57 15.3,39.26 15.53,39.6 | v16.31,26.89 16.33,26.7 | v14.18,26.66 14.27,26.57 | v43.65,39.94 43.65,39.83 43.93,39.54 | v89.89,39.71 78.53,39.71 77.96,39.15 v72,39.15
  Bottom 0.813: RASPPI.6 58.42,66.45 58.5,66.38 | 25.47,57.43 25.47,57.44 25.78,57.75 v25.78,57.89 25.34,57.89 23.94,56.49
  pour Top: 4.12,85.95 130.33,85.95 130.53,85.75 130.53,2.56 129.94,1.97 2.35,1.97 1.57,2.75 1.57,83.2 4.12,85.75
INTERRUPT
  Top 0.2: SW1.P$1 89.71,52.07 83.52,52.07 83.52,61.72 86.1,64.3 86.1,64.86 85.7,65.26 58.98,65.26 57.37,66.87 57.37,68.36 RASPPI.7
IRP1
  Top 0.2: U1.3 18.54,57.21 18.11,57.21 17.54,57.78 17.54,60.96 11.43,67.07 11.43,67.31 U$1.P12
IRP2
  Top 0.2: U$1.P16 13.97,73.66 13.97,66.04 19.23,60.78 U1.1
IRP3
  Top 0.2: U$1.42 82.37,78.56 82.37,75.34 82.36,75.34 82.36,74.6 77.75,69.99 77.6,69.99 77.33,70.26 77.28,70.26 77.22,70.19 75.8,68.78 75.16,68.78 74.99,68.6 74.99,68.18 U2.5
IRP4
  Top 0.2: U$1.43 84.87,78.52 83.38,78.52 82.77,77.91 82.77,75.18 82.76,75.17 82.76,74.44 77.76,69.43 77.6,69.59 77.18,69.59 75.56,67.98 U2.6
IRP5  (via drill 0.35)
  Top 0.25: v16.2,52.65 18.68,50.17 19.12,50.17 U1.8 | v89.78,84.26 93.94,80.1 U$1.46
  Bottom 0.25: v16.2,52.65 16.2,60.52 12.04,64.69 12.04,74.7 21.6,84.26 v89.78,84.26
IRP6  (via drill 0.35)
  Top 0.2: U$1.69 122.97,45.5 121.48,45.5 120.87,44.89 120.87,43.4 112.32,34.85 97.06,34.85 96.39,35.52 96.39,37.51 84.96,48.94 64.52,48.94 63.7,48.12 63.7,47.06 59.91,43.27 59.91,36.83 v49.53,36.83 | v39.37,35.56 38.73,34.92 U3.1
  Bottom 0.2: v49.53,36.83 48.94,36.24 45.44,36.24 44.76,35.56 43.17,35.56 42.58,36.15 41.55,36.15 40.96,35.56 v39.37,35.56
IRP7  (via drill 0.35)
  Top 0.2: U$1.70 122.97,42.96 121.48,42.96 112.45,33.93 112.35,33.93 112.26,34.02 94.46,34.02 85.55,42.93 v80.46,42.93 | v73.55,40.94 73.37,41.12 v68.2,41.12 | U3.2 40.01,34.66 41.4,34.66 v41.86,35.13
  Bottom 0.2: v73.55,40.94 76.21,40.94 77.19,39.96 77.75,39.96 78.15,40.36 78.15,40.62 v80.46,42.93 | v41.86,35.13 45.19,35.13 45.44,34.88 61.96,34.88 v68.2,41.12
IRP8
  Top 0.2: U$1.P2 11.21,42.96 11.21,45.94 9.72,45.94 8.71,46.95 8.71,54.65 9.17,55.11 9.17,55.37 9.72,55.92 11.49,55.92 14.07,53.34 16.51,53.34 17.14,53.98 U1.5
IRPD
  Bottom 0.2: RASPPI.36 21.41,68.4 30.52,68.4 31.53,69.41 31.53,70.9 33.09,72.46 40.79,72.46 42.86,74.53 49.35,74.53 51.85,77.03 51.85,78.56 62.05,78.56 U$1.34
L1
  Bottom 0.2: IC5.22 88.22,71.41 88.22,71.58 88.39,71.75 88.56,71.75 92.61,75.8 101.42,75.8 102.65,77.03 102.65,77.96 103.44,78.74 105.41,78.74 U$1.51
L2
  Bottom 0.2: IC5.23 89.49,71.41 89.49,71.58 92.71,74.8 92.71,74.93 93.18,75.4 101.59,75.4 102.39,76.2 104.14,76.2 104.36,76.42 104.58,76.42 105.63,77.47 105.63,77.91 106.46,78.74 107.95,78.74 U$1.52
MB73
  Top 0.2: U$1.73 122.97,35.34 121.48,35.34 117.89,31.75 110.49,31.75 109.8,31.06 105.59,31.06 105.42,30.88 105.42,30.38 IC4.13
MB74
  Top 0.2: U$1.74 124.46,35.34 125.51,36.39 125.51,37.27 124.9,37.88 124.02,37.88 123.41,37.27 123.41,36.34 122.81,35.74 121.32,35.74 118.59,33.02 106.28,33.02 104.14,30.88 104.14,30.38 IC4.14
MISO  (via drill 0.35)
  Top 0.2: RASPPI.21 38.1,68.8 37.05,67.75 37.05,66.64 28.91,58.51 v28.91,57.79 | U$5.37 49.31,22.86 50.36,21.81 51.24,21.81 51.85,22.42 51.85,23.35 52.45,23.95 56.48,23.95 57.33,24.8 57.33,26 56.48,26.85 56.26,26.85 48.26,34.86 v48.26,35.56 | v45.72,35.56 43.81,37.47 U3.12 43.81,38.73 32.96,49.59 22.84,49.59 22.26,50.16 22.26,52.71 22.66,53.11 | 22.84,53.28 23.26,53.28 U1.12 23.95,54.47 24.15,54.67 24.15,54.59 22.84,53.28 | v74.2,70.48 74.3,70.58 U2.12 | v41.55,68.57 44.13,68.57 v44.19,68.51 | 22.84,53.28 22.66,53.11 | 22.66,53.11 22.66,51.03 22.84,50.86 25.07,50.86 25.24,51.03 25.24,51.43 31.3,57.49 33.48,57.49 v33.56,57.57
  Bottom 0.2: v48.26,35.56 v45.72,35.56 | RASPPI.21 39.34,68.61 41.51,68.61 v41.55,68.57 | v74.2,70.48 72.59,70.48 71.77,71.3 59.26,71.3 58.22,72.34 46.72,72.34 44.67,70.29 44.67,68.99 v44.19,68.51 | 32.14,58.38 29.5,58.38 v28.91,57.79 | 33.33,57.57 v33.56,57.57 32.95,57.57 32.14,58.38 | 32.52,58.38 32.14,58.38
MOSI  (via drill 0.35)
  Top 0.2: RASPPI.19 40.64,69.39 39.15,67.91 39.15,66.87 | 39.15,66.87 36.2,63.92 26.29,54.01 25.8,54.49 v25.73,54.49 25.24,54 25.24,53.48 24.47,52.7 U1.11 | U$5.36 52.29,24.35 56.32,24.35 56.93,24.96 56.93,25.84 56.32,26.45 56.1,26.45 45.09,37.47 U3.11 | 45.09,38.35 U3.11 | 46.77,68.8 46.77,66.87 46.16,66.26 42.74,66.26 42.6,66.4 41.22,66.4 41.08,66.26 40.2,66.26 39.59,66.87 39.15,66.87 | 66.21,68.8 68.35,66.66 68.81,66.2 72.16,66.2 72.33,66.37 72.33,68.89 73.44,68.89 74.35,69.8 74.48,69.8 75.56,70.89 U2.11 | U3.11 45.09,37.5 45.95,36.63 46.76,36.63 46.93,36.81 46.93,46.65 41.41,52.17 31.26,52.17 31.25,52.18 28.4,52.18 v28.32,52.26
  Top 0.25: v68.29,66.49 68.29,66.6 68.35,66.66 | v67.84,64.58 57.6,64.58 56.81,65.36 42.08,65.36 39.04,62.33 39.04,62.21 38.59,61.76 38.02,61.76 37.58,62.21 37.58,62.55 36.2,63.92
  Bottom 0.2: v28.32,52.26 26.81,52.26 26.81,53.41 v25.73,54.49
  Bottom 0.25: v68.29,66.49 68.29,65.03 v67.84,64.58
N$1
  Bottom 0.2: R3.2 R4.1
N$2  (via drill 0.35)
  Top 0.2: v101.6,35.56 100.89,36.27 U4.3
  Bottom 0.2: D1.K 93.98,35.07 C15.1 C12.1 97.66,34.29 100.33,34.29 v101.6,35.56
N$3  (via drill 0.35)
  Top 0.2: v96.52,53.34 97.16,52.7 U5.2 | v95.5,56.23 94.58,57.15 93.03,57.15 92.82,57.36 92.82,57.9 92.59,58.13 v92.59,58.39
  Bottom 0.2: R8.1 71.57,52.07 72.87,53.37 73.82,53.37 R4.2 R5.1 81.15,58.42 92.56,58.42 v92.59,58.39 | v96.52,53.34 96.52,56.21 96.5,56.23 v95.5,56.23
N$4
  Bottom 0.2: R5.2 R6.1 86.2,53.37 87.15,53.37 88.45,52.07 R11.2
N$5
  Bottom 0.25: R6.2 86.51,55.91 88.76,55.91 R7.1
N$6  (via drill 0.35)
  Top 0.2: v97.79,57.15 98.42,57.78 U5.6
  Bottom 0.2: R8.2 R9.1 78.58,54.58 79.53,54.58 80.31,55.36 80.31,57 80.49,57.18 90.63,57.18 95.59,57.18 96.24,57.83 96.8,57.83 97.48,57.15 v97.79,57.15
N$7  (via drill 0.35)
  Top 0.2: 87.91,49.16 87.94,49.16 87.94,48.7 88.41,48.23 | v92.47,50.52 96.43,50.52 v96.59,50.68 | U5.9 93.95,57.55 95.14,57.55 96.47,56.22 v97.31,56.22 | v89.49,47.61 88.88,48.23 88.41,48.23 | 88.41,48.23 87.23,48.23 v86.68,48.78
  Bottom 0.2: v79.04,53.86 78.87,53.69 R9.2 R10.1 81.28,52.2 81.28,54.58 82.85,53.01 82.85,50.95 83.03,50.77 86.3,50.77 86.3,49.16 v86.68,48.78 | v89.49,47.61 89.56,47.61 v92.47,50.52 | v96.59,50.68 96.59,52.45 97.2,53.06 97.2,53.62 97.16,53.66 97.16,56.07 v97.31,56.22
N$8  (via drill 0.35)
  Top 0.2: v91.44,52.07 92.08,52.7 U5.13
  Bottom 0.2: R10.2 R11.1 86.81,52.07 88.11,50.77 89.95,50.77 91.25,52.07 v91.44,52.07
N$9
  Top 0.2: D2.11 D2.12 D2.13 D2.14 D2.15 118.11,64.77 U$4.2
N$10  (via drill 0.35)
  other vias: 24.1,81.73
N$11
  pour Bottom: 3.53,85.75 129.95,85.75 130.73,84.97 130.73,3.15 129.94,2.36 3.54,2.36 1.18,4.72 1.18,83 1.18,83.2 3.34,85.36
N$12  (via drill 0.35)
  Bottom 0.813: 97.38,17.78 97.38,16.94 90.82,10.38 v78.04,10.38
N$14
  Top 0.2: D2.10 D2.9 104.17,50.84 102.3,50.84 98.6,50.84 98,51.44 95.24,51.44 U5.14
N$15
  Top 0.2: D2.8 106.59,55.79 106.63,55.79 107.43,56.59 107.43,62.23 106.47,63.19 93.98,63.19 90.76,59.97 90.76,59.41 91.16,59.01 91.72,59.01 92,59.29 93.48,59.29 U5.8
N$16
  Top 0.2: U5.7 99.99,58.38 100.04,58.38 101.28,57.15 D2.7
N$17
  Top 0.2: D2.6 105.41,59.17 107.03,57.55 107.03,56.75 106.47,56.19 104.13,56.19 101.75,53.81 101.75,51.97 101.22,51.44 U5.1
N$19
  Top 0.2: C8.1 100.97,22.36 IC4.1
N$20
  Top 0.2: C8.2 103.5,22.09 IC4.3
N$21
  Top 0.2: C9.1 104.78,21.09 IC4.4
N$22
  Top 0.2: C9.2 106.05,21.09 IC4.5
N$23
  Top 0.2: LED1.A 19.34,31.61 IC3.23
N$24
  Top 0.2: LED2.A 20,30.31 IC3.22
N$25
  Top 0.2: R12.1 LED1.C
N$26
  Top 0.2: LED2.C R13.1
PEL
  Bottom 0.2: U$1.62 122.97,66.26 122.97,67.75 122.36,68.36 121.48,68.36 119.16,70.68 119.16,79.74 117.23,81.68 116.84,81.68 115.97,82.55 48.26,82.55 | 48.26,82.55 46.99,82.55 | RASPPI.18 43.18,68.36 42.13,69.41 42.13,71.34 32.54,71.34 31.93,70.74 31.93,67.27 30.92,66.26 19.88,66.26 19.05,67.09 18.22,66.26 17.34,66.26 16.73,66.87 16.73,70.29 17.34,70.9 18.27,70.9 24.35,76.98 24.35,77.91 24.96,78.52 30.97,78.52 31.97,79.52 31.97,80.45 32.58,81.06 33.46,81.06 34.29,80.23 35.52,81.46 47.17,81.46 48.26,82.55
PER  (via drill 0.35)
  Top 0.2: v49.53,78.74 49.31,78.52 49.31,74.94 44.67,70.29 44.67,69.41 45.72,68.36 RASPPI.16
  Bottom 0.2: U$1.63 122.97,63.72 122.97,65.21 122.36,65.82 120.87,65.82 120.87,67.31 118.55,69.63 117.81,69.63 116.35,71.09 117.89,72.63 117.89,80.45 117.06,81.28 78.04,81.28 77.64,81.68 58.03,81.68 57.63,81.28 50.8,81.28 50.58,81.06 50.36,81.06 49.53,80.23 v49.53,78.74
PWML
  Bottom 0.2: IC5.21 86.95,71.41 86.95,71.58 91.57,76.2 99.06,76.2 99.28,76.42 99.5,76.42 100.55,77.47 100.55,77.91 101.38,78.74 102.87,78.74 U$1.50
PWMR
  Bottom 0.2: IC5.25 92.03,71.41 92.03,71.58 95.05,74.6 103.89,74.6 105.09,75.8 109.04,75.8 110.27,77.03 110.27,77.96 111.06,78.74 113.03,78.74 U$1.54
R1
  Bottom 0.2: IC5.24 90.76,71.41 90.76,71.58 93.98,74.8 93.98,74.93 94.05,75 103.73,75 104.93,76.2 106.11,76.2 106.33,76.42 107.12,76.42 107.73,77.03 107.73,77.82 108.65,78.74 110.49,78.74 U$1.53
R2
  Bottom 0.2: IC5.26 93.3,71.41 93.3,71.58 94.11,72.39 102.87,72.39 105.88,75.4 109.21,75.4 110.01,76.2 115.57,76.2 115.79,76.42 115.79,77.91 116.84,78.96 U$1.55
RASP_5V  (via drill 0.35)
  Top 0.813: v67.54,63.38 67.54,62.55 66.3,61.31 66.3,57.45 v62.13,53.28 | 60.55,47.53 v60.55,47.2 60.55,44.91 59.2,43.56 59.2,41.4 v57.85,40.05 | C4.2 74.87,11.44 73.36,12.95 | 75.37,12.95 73.36,12.95 | 73.36,12.95 71.26,12.95 68.3,9.99 IC2.OUT | 73.36,12.95 86.49,12.95 v94.44,20.9 | v94.54,28.32 93,28.32 v83.91,37.41 | v71.32,37.02 71.22,37.02 v68.78,39.46
  Bottom 0.813: RASPPI.2 63.61,67.31 v67.54,63.38 | v62.13,53.28 62.13,48.78 v60.55,47.2 | v94.44,20.9 94.44,28.22 v94.54,28.32 | v83.91,37.41 71.71,37.41 v71.32,37.02 | v68.78,39.46 68.78,40.31 69.19,40.71 69.19,41.53 68.61,42.1 67.79,42.1 65.74,40.05 v57.85,40.05
RS
  Bottom 0.2: RASPPI.37 24.35,76.42 30.92,76.42 31.75,77.25 31.75,78.74 U$1.22
RX  (via drill 0.35)
  Top 0.25: v51.75,54.34 51.75,56.25 51.52,56.48 51.52,62.89 53.21,64.58 v53.55,64.58
  Bottom 0.25: v51.75,54.34 37.24,39.83 37.24,19.57 40.61,16.2 40.61,15.3 U$3.RX | v53.55,64.58 55.8,66.83 55.8,67.28 RASPPI.8
RXFT
  Top 0.2: IC3.5 18.84,21.62 18.84,20.9 19.05,20.7 19.05,19.05 19.27,18.83 33.46,18.83 34.51,17.78 U$3.RXFT
RXP
  Top 0.2: U$3.RXP 49.35,21.41 63.54,21.41 64.99,22.86 U$5.30
RXRS
  Top 0.2: U$3.RXRS 42.13,14.19 84.55,14.19 93.22,22.86 95.25,22.86 100.33,27.94 105.41,27.94 106.05,28.57 IC4.12
RXXB
  Top 0.2: U$3.RXXB 36.83,13.97 33.02,13.97 32.8,14.19 32.58,14.19 31.53,15.23 31.53,16.73 19.2,16.73 15.2,20.73 15.2,30.07 15.24,30.11 15.24,30.48 13.9,31.82 13.2,31.82 12.38,32.64 12.38,34.05 8.11,38.32 7.18,38.32 5.95,39.55 5.95,72.21 7.18,73.44 8.67,73.44 8.89,73.66 9.11,73.44 10.6,73.44 11.21,72.83 11.21,71.95 10.16,70.9 U$1.P13
SCL  (via drill 0.35)
  Top 0.2: U$5.28 72.17,22.86 75.22,19.81 89.6,19.81 91.84,22.05 91.84,26.21 78.74,39.31 78.74,44.45 77.47,45.72 IC6.12 | v77.47,59.69 v80.01,59.69
  Top 0.25: v68.17,52.99 v68.17,57.6 | v72,46.8 74.59,46.8 75.6,45.79 75.83,45.79 IC6.12
  Bottom 0.2: RASPPI.5 59.91,68.36 59.91,66.87 67.09,59.69 68.17,59.69 v77.47,59.69 | v80.01,59.69 81.28,60.96 IC5.12
  Bottom 0.25: v68.17,57.6 68.17,59.69 | v68.17,52.99 68.17,50.62 v72,46.8
SCLK  (via drill 0.35)
  Top 0.2: U$5.38 45.72,23.91 46.77,24.96 46.77,25.84 46.16,26.45 45.94,26.45 43.12,29.27 43.12,34.31 42.55,34.89 U3.13 41.85,38.61 41.85,39.04 31.71,49.19 22.67,49.19 21.86,50 21.86,53.58 23.53,55.24 U1.13 24.64,55.94 25.07,55.94 34.07,64.94 34.07,68.36 RASPPI.23 | v72.3,69.81 73.03,70.53 U2.13
  Bottom 0.2: RASPPI.23 36.88,68.53 36.88,68.36 38.54,68.36 39.59,67.31 39.59,66.87 38.86,66.15 38.86,64.69 38.86,64.68 | 39.55,64.18 39.38,64.18 39.36,64.18 | 39.55,64.18 39.68,64.18 | v72.3,69.81 72.02,69.53 65.63,69.53 65.01,68.92 64.62,68.92 64.5,68.8 63.06,68.8 62.45,69.41 62.45,69.86 61.4,70.9 57.98,70.9 57.37,70.29 57.37,69.84 56.32,68.8 45.28,68.8 44.87,68.38 44.87,68.23 44.23,67.59 44.23,66.87 43.62,66.26 41.63,66.26 39.55,64.18
  Bottom 0.25: 39.38,64.18 39.38,64.24 38.92,64.69 38.86,64.69
SDA  (via drill 0.35)
  Top 0.2: U$5.27 74.71,22.86 77.36,20.21 89.43,20.21 91.15,21.93 91.15,23.84 91.44,24.13 91.15,24.42 91.15,26.33 77.47,40.02 v77.47,40.64 | v78.74,45.72 77.47,46.99 IC6.13 75.31,47.58 75.14,47.58 74.75,47.97 v68.05,47.97 | v66.85,53.72 67.28,54.15 v67.28,60.9
  Bottom 0.2: v77.47,40.64 78.74,41.91 v78.74,45.72 | RASPPI.3 62.45,68.36 62.45,66.87 67.12,62.2 67.39,62.2 | IC5.13 79.42,61.85 79.42,62.02 79.25,62.2 67.39,62.2 | v68.05,47.97 66.85,49.17 v66.85,53.72 | v67.28,60.9 67.39,61.01 67.39,62.2
SERVO1  (via drill 0.35)
  Top 0.2: v101.6,66.04 104.05,63.59 106.63,63.59 107.83,62.39 107.83,49.93 104.21,46.31 v104.21,46.23
  Top 0.25: v57.83,65.36 57.38,65.81 55.8,65.81 54.79,66.83 54.79,67.5 53.89,68.4 53.21,68.4 51.86,69.75 50.85,69.75 RASPPI.11 | v56.81,64.35 56.81,63.79 61.76,58.84 v61.76,54.34 | v77.96,47.59 85.28,47.59 v86.74,46.12
  Bottom 0.2: IC5.28 100.03,66.04 v101.6,66.04 | U$7.2 v105.41,43.18 105.41,45.03 v104.21,46.23
  Bottom 0.25: v56.81,64.35 v57.83,65.36 | v61.76,54.34 62.21,54.34 66.38,50.17 66.38,48.6 68.96,46.01 76.39,46.01 v77.96,47.59 | v86.74,46.12 104.17,46.12 v104.21,46.23
SERVO2  (via drill 0.35)
  Top 0.25: v108.56,68.96 106.65,70.88 104.06,70.88 98.89,65.7 63.56,65.7 62.33,66.94 62.33,67.5 61.42,68.4 60.86,68.4 59.85,69.41 59.85,69.97 58.84,70.99 50.4,70.99 49.27,69.86 48.26,69.86 RASPPI.13
  Bottom 0.2: IC5.1 100.08,56.43 103.79,52.72 103.79,51.67 104.97,50.49 106.47,50.49 109.44,47.52 109.44,42.74 110.49,41.69 U$7.2'
  Bottom 0.25: v108.56,68.96 108.56,67.72 108.45,67.61 108.45,62.55 106.65,60.75 104.4,60.75 100.08,56.43
SERVO3  (via drill 0.35)
  Top 0.25: v51.64,75.71 45.79,69.86 RASPPI.15 | v90.11,75.71 119.47,75.71 120.94,74.25 120.94,73.01 119.25,71.33 119.25,46.91 113.06,40.73 U$7.2"
  Bottom 0.2: IC5.2 94.57,60.67 94.57,60.5 94.75,60.33 95.57,60.33 103.39,52.51 103.39,49.53 109.04,43.88 109.04,40.6 110.05,39.59 110.93,39.59 111.98,40.64 U$7.2"
  Bottom 0.25: v90.11,75.71 v51.64,75.71
SIR1
  Top 0.2: U1.4 18.54,55.94 18.11,55.94 17.14,56.91 17.14,60.79 13.16,64.77 U$1.P11
SIR2
  Top 0.2: U$1.P15 13.57,71.52 13.57,65.87 17.94,61.51 17.94,58.65 18.11,58.48 18.54,58.48 U1.2
SIR3
  Top 0.2: U$1.41 79.79,78.52 78.3,78.52 77.69,77.91 77.69,76.42 76.2,74.93 76.2,69.85 75.53,69.18 74.29,69.18 73.72,68.6 73.72,68.18 U2.4
SIR4
  Top 0.2: U2.7 76.83,67.94 85.31,76.42 85.31,77.91 85.92,78.52 87.41,78.52 U$1.44
SIR5
  Top 0.2: U$1.45 89.95,78.52 88.46,78.52 87.85,77.91 87.85,77.23 U2.8
SIRD  (via drill 0.35)
  Top 0.2: RASPPI.32 25.56,67.15 v25.56,64.02 | U$1.33 59.91,80.01 58.86,81.06 52.9,81.06 52.29,80.45 52.29,80 51.24,78.96 50.36,78.96 49.75,79.57 49.75,80.02 49.31,80.02 49.31,79.57 48.3,78.56 46.77,78.56 46.77,77.03 45.54,75.8 27.32,75.8 21.81,70.29 21.81,66.87 22.04,66.64 v22.04,63.8
  Bottom 0.2: v25.56,64.02 25.34,63.8 v22.04,63.8
TX  (via drill 0.35)
  Top 0.25: v50.17,60.19 50.17,64.24 v50.51,64.58
  Bottom 0.25: v50.17,60.19 33.52,43.54 33.52,42.08 34.2,41.4 34.2,17.32 33.08,16.2 33.08,15.3 U$3.TX | v50.51,64.58 53.33,67.39 RASPPI.10
TXFT
  Top 0.2: IC3.1 16.25,21.62 16.25,20.9 19.37,17.78 U$3.TXFT
TXP  (via drill 0.35)
  Top 0.2: v67.31,12.7 42.7,12.7 41.24,11.25 32.98,11.25 31.97,12.26 31.97,13.75 U$3.TXP | v67.31,15.24 68.58,16.51 U$5.29
  Bottom 0.2: v67.31,12.7 v67.31,15.24
TXRS
  Top 0.2: U$3.TXRS 39.15,12.7 40.2,11.65 41.08,11.65 43.22,13.79 84.71,13.79 84.89,13.97 | 84.89,13.97 85.09,13.97 | 84.89,13.97 92.52,21.59 92.71,21.59 93.58,22.46 95.42,22.46 100.5,27.54 105.61,27.54 106.67,28.6 106.67,29.1 IC4.11
TXXB
  Top 0.2: U$1.P14 9.11,72.39 8.06,71.34 7.62,71.34 6.57,70.29 6.57,70.07 6.35,69.85 6.35,43.18 7.84,43.18 8.67,42.35 8.67,41.91 9.72,40.86 10.65,40.86 17.46,34.05 17.46,32.64 18.28,31.82 18.92,31.82 18.95,31.59 18.95,30.07 15.77,30.07 15.6,29.9 15.6,20.9 19.37,17.13 31.7,17.13 32.53,16.29 33.46,16.29 34.51,15.24 U$3.TXXB
USB+  (via drill 0.35)
  Top 0.2: 24.55,27.54 24.69,27.39 25.44,26.64 25.44,25.65 25.62,25.47 27.46,25.47 28.02,26.02 28.02,35.7 10.6,53.12 9.72,53.12 9.11,52.51 9.11,49.09 10.16,48.04 U$1.P4
  Top 0.25: v24.64,30.38 24.64,29.02 IC3.15 | v24.64,27.23 24.64,27.34 24.69,27.39
  Bottom 0.25: v24.64,27.23 v24.64,30.38
USB-
  Top 0.2: IC3.16 23.89,32.55 23.18,33.26 23.18,36.51 U$1.P5
V+
  Top 0.2: C10.1 100.63,19.48 100.63,21.34 102.23,22.95 IC4.2
V-
  Top 0.2: C7.1 107.31,22.09 IC4.6
VOLT_SENS  (via drill 0.35)
  Top 0.2: C2.1 C1.2 R1.2 R2.1 C2.1 | U5.10 91.79,56.52 91.22,55.95 88.7,55.95 C2.1 | U5.10 94.39,55.84 94.44,55.84 94.62,55.67 94.62,54.82 94.44,54.65 94.39,54.65 U5.12 94.83,53.98 95.41,54.56 98.73,54.56 U5.3 | U5.10 94.39,56.52 94.82,56.09 94.82,55.95 95.22,55.55 95.36,55.55 95.51,55.4 98.15,55.4 98.6,55.84 98.65,55.84 U5.5
  Top 0.25: v47.48,21.71 45.34,21.71 44.55,22.5 44.55,23.06 43.65,23.96 43.09,23.96 42.08,24.98 42.08,25.54 37.24,30.38 37.24,40.5 34.65,43.09 27,43.09 20.59,49.5 20.59,51.86 19.8,52.65 19.24,52.65 U1.6 | v92.47,53.44 93.26,53.44 93.71,53.89 U5.12
  Bottom 0.25: v47.48,21.71 79.2,21.71 80.1,22.61 80.1,23.29 81.11,24.3 81.79,24.3 82.69,25.2 82.69,26.55 90.67,34.54 90.67,41.17 85.95,45.9 85.95,46.35 89.89,50.29 90.67,50.29 92.47,52.09 v92.47,53.44
VUSB
  Top 0.2: 25.27,27.94 C5.1 26.54,29.65 27.62,30.72 27.62,34.61 U$1.P6 | 22.86,27.94 21.59,27.94 21.3,28.23 IC3.20 | 22.86,27.94 25.27,27.94 | C6.1 25.27,27.94 | IC3.4 18.2,21.93 18.2,22.65 22.86,27.31 22.86,27.94
WLS1
  Top 0.2: U$1.30 54.83,78.52 54.83,77.03 60.74,71.12 66.04,71.12 69.22,67.94 U2.1
WLS2
  Top 0.2: U$1.31 57.15,78.74 57.15,75.28 60.91,71.52 66.88,71.52 69.79,68.6 69.79,68.18 U2.2
WLS3
  Top 0.2: U$1.32 59.69,78.74 59.69,73.66 61.43,71.92 67.75,71.92 71.06,68.6 71.06,68.18 U2.3
WLSD
  Bottom 0.2: 42.7,74.93 46.99,74.93 | 42.7,74.93 40.63,72.86 31.52,72.86 28.99,70.34 28.99,69.41 28.38,68.8 27.5,68.8 26.67,69.63 25.84,68.8 24.96,68.8 24.13,69.63 23.3,68.8 22.42,68.8 21.59,69.63 20.76,68.8 19.27,68.8 RASPPI.38 | 42.7,74.93 44.18,76.42 48.7,76.42 49.75,77.47 49.75,77.91 50.8,78.96 56.32,78.96 56.93,79.57 56.93,79.58 57.37,80.01 57.37,80.45 58.2,81.28 77.47,81.28 U$1.40
XADC1
  Top 0.2: U$5.2 41.27,27.3 U3.3
XADC2
  Top 0.2: U$5.3 42.55,28.57 U3.4
XADC3
  Top 0.2: U$5.4 43.81,29.84 U3.5
XADC4
  Top 0.2: U$5.5 45.09,31.11 U3.6
XADC5
  Top 0.2: U$5.6 46.35,32.38 U3.7
XADC6
  Top 0.2: U$5.7 48.08,33.2 U3.8
XGPIO1
  Bottom 0.2: U$5.8 58.42,26.98 79.42,47.98 79.42,48.54 77.19,50.77 70.07,50.77 69.89,50.95 69.89,53.19 70.47,53.77 73.65,53.77 75.23,55.35 75.23,57 75.41,57.18 79.34,57.18 80.98,58.82 86.36,58.82 IC5.8
XGPIO2
  Top 0.2: U$5.9 63.5,27.94 63.5,38.1 66.04,40.64 IC6.21
XGPIO3
  Top 0.2: U$5.10 63.5,27.37 63.9,27.77 63.9,37.93 65.34,39.37 IC6.22
XGPIO4
  Top 0.2: U$5.11 64.77,26.67 64.77,36.83 66.04,38.1 IC6.23
XGPIO5
  Top 0.2: U$5.12 66.04,27.94 65.17,27.94 65.41,28.18 65.41,36.06 65.58,36.24 65.75,36.24 IC6.24
XGPIO6
  Top 0.2: IC6.25 66.93,34.97 68.69,34.97 77.65,26 77.65,24.8 76.8,23.95 73.62,23.95 72.17,25.4 U$5.13
XGPIO7
  Top 0.2: U$5.14 74.71,25.4 75.76,24.35 76.64,24.35 77.25,24.96 77.25,25.84 76.64,26.45 76.42,26.45 68.58,34.29 IC6.26
XGPIO8
  Top 0.2: U$5.15 68.58,33.02 IC6.27
XGPIO9  (via drill 0.35)
  Top 0.2: IC6.28 70.15,27.94 v72.39,27.94 | v77.47,27.94 78.74,26.67 U$5.16
  Bottom 0.2: v72.39,27.94 v77.47,27.94
XGPIO10
  Top 0.2: U$5.17 75.9,30.78 IC6.1
XGPIO11
  Top 0.2: U$5.18 76.2,33.02 IC6.2
XGPIO12
  Top 0.2: U$5.19 77.47,34.29 IC6.3
XGPIO13
  Top 0.2: U$5.22 86.36,23.91 87.41,24.96 87.41,25.84 86.8,26.45 86.58,26.45 77.47,35.56 IC6.4
XGPIO14
  Top 0.2: U$5.23 84.87,22.86 85.92,21.81 86.8,21.81 87.81,22.82 87.81,26 82.55,31.27 82.55,31.75 77.47,36.83 IC6.5
XGPIO15
  Top 0.2: U$5.24 82.33,22.86 83.78,21.41 88.94,21.41 89.95,22.42 89.95,25.84 89.34,26.45 87.93,26.45 82.95,31.43 82.95,31.92 76.77,38.1 IC6.6
XGPIO16
  Top 0.2: U$5.25 79.79,22.86 81.64,21.01 89.1,21.01 90.35,22.26 90.35,26 89.5,26.85 88.9,26.85 76.38,39.37 IC6.7
XGPIO17
  Top 0.2: U$5.26 77.25,22.86 79.5,20.61 89.27,20.61 90.75,22.09 90.75,26.17 76.87,40.05 76.49,40.05 IC6.8